# Altium PCB driver_PCB.PcbDoc
Units mil, origin at the board's own origin, x right, y up, seen from the top; angles counter-clockwise.
Board outline 3950 x 1975 mil, 2 copper layers (Top Layer, Bottom Layer); 49 components, 34 nets, 120 pads, 20 vias.
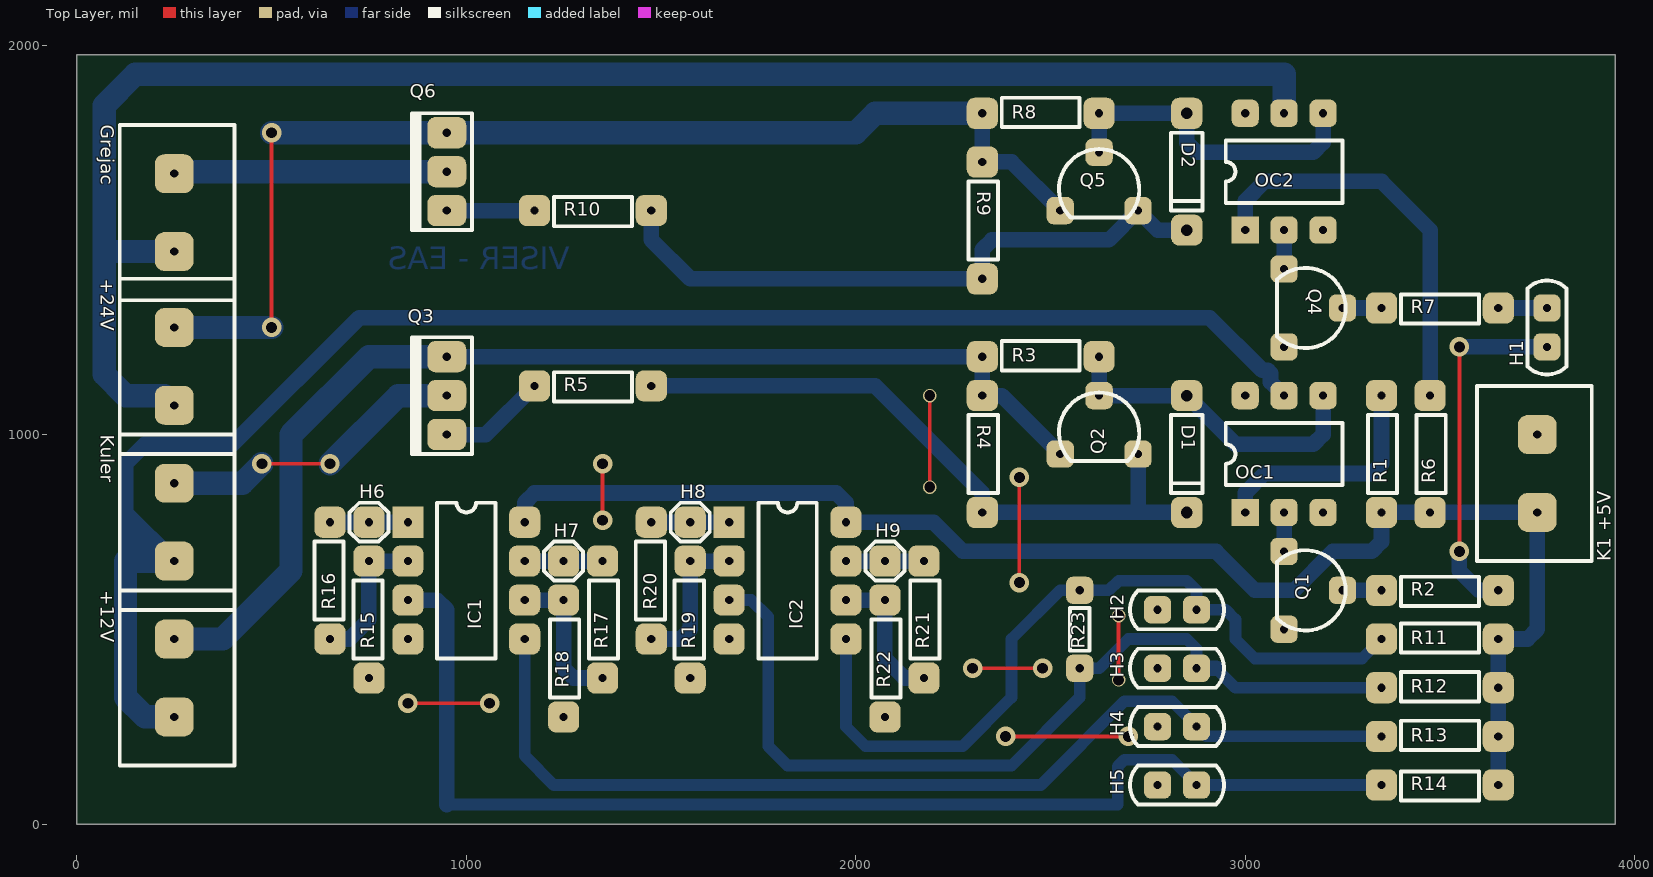
[diagram p0: Top Layer view]
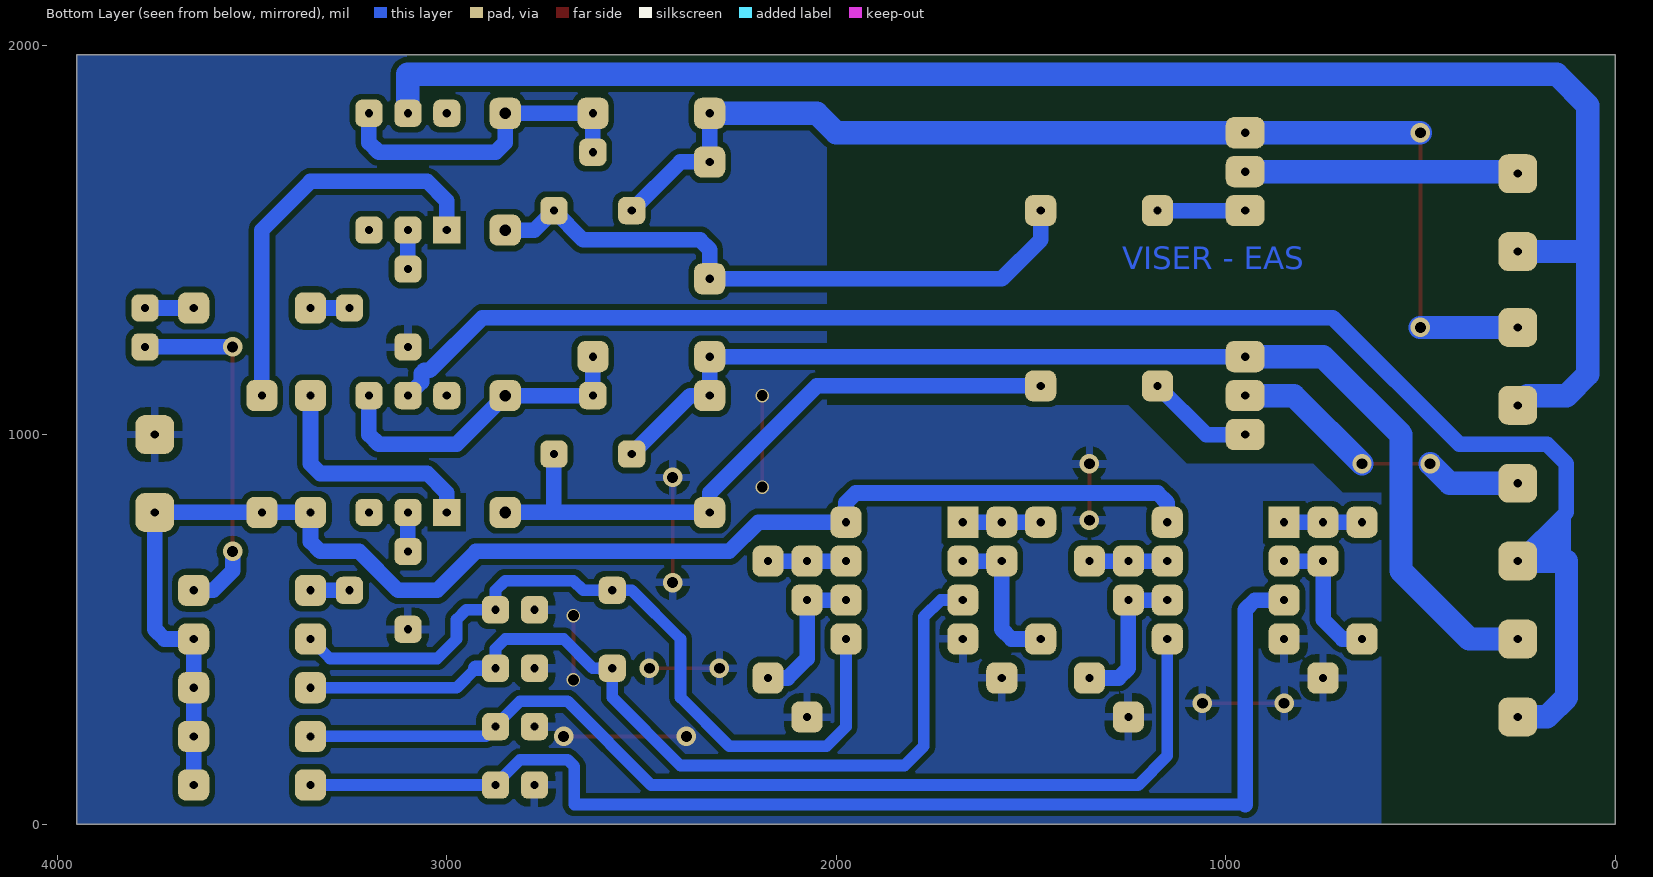
[diagram p1: Bottom Layer view, seen from below]
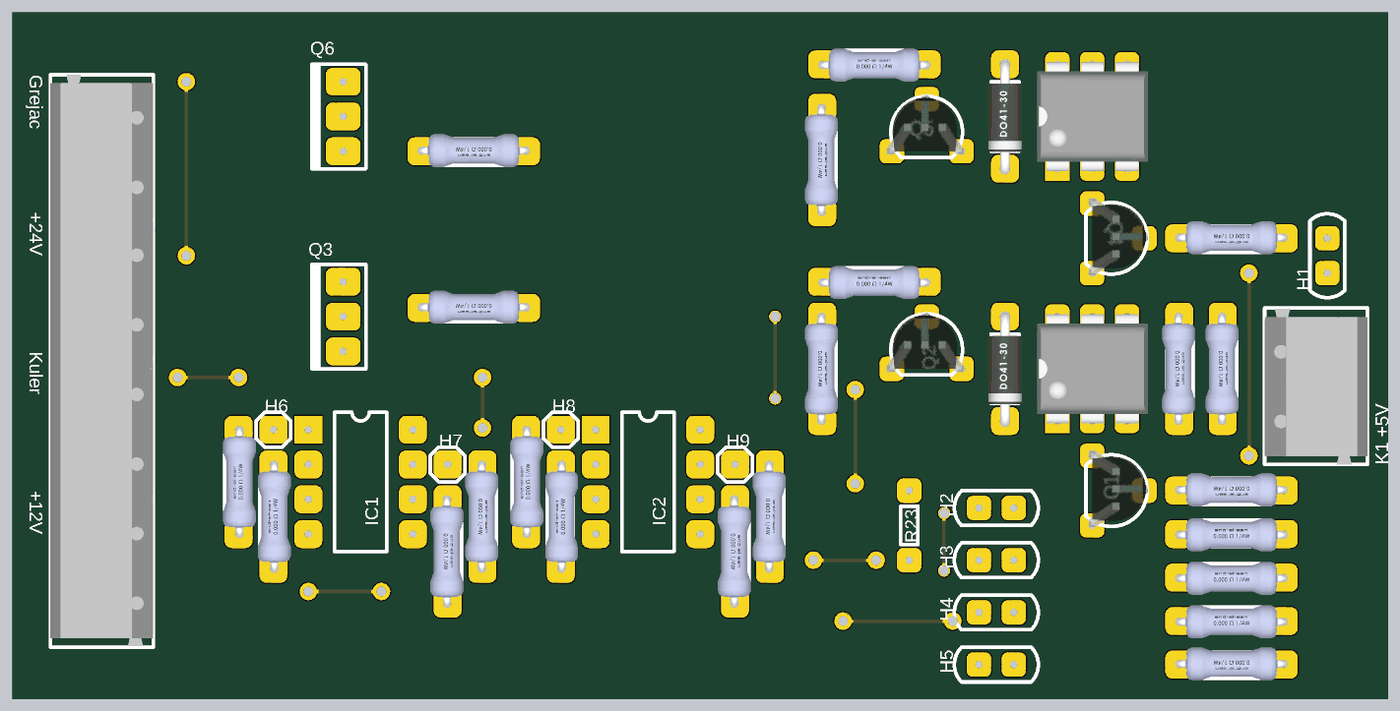
[diagram p2: 3D render of the assembled board from above, using the file's embedded part models]

## Layer stack, top to bottom
Top Solder: solder mask 0.4, Solder Resist, Dk 3.5
Top Layer: signal copper 1.4
Dielectric 1: dielectric 12.6, FR-4, Dk 4.8
Bottom Layer: signal copper 1.4
Bottom Solder: solder mask 0.4, Solder Resist, Dk 3.5

## Board outline
0,0 3950,0 3950,1975 0,1975

## Design rules (kind name [scope] priority, off if disabled: settings)
Clearance [All] p1: gap=15
PlaneClearance [All] p1: clearance=10
PlaneConnect [All] p1: planeconnectstyle=Relief reliefexpansion=20 reliefentries=4 reliefconductorwidth=20 reliefairgap=10
PolygonConnect [All] p1: connectstyle=Relief reliefconductorwidth=20 reliefentries=4 polygonreliefangle="90 Angle" airgapwidth=20
RoutingVias [All] p1: holewidth=28 width=50 viastyle="Through Hole" minholewidth=28 minwidth=50 maxholewidth=28 maxwidth=50
SolderMaskExpansion [All] p1: expansion=4
Width [All] p1: maxlimit=60 minlimit=10 preferedwidth=40 toplayer_maxwidth=10 toplayer_prefwidth=10 bottomlayer_minwidth=20 minimp=50.000000 maximp=50.000000 favimp=50.000000
28 further rules are at their usual default settings.

## Components (designator, comment, footprint, x,y, rotation, side; value= is the part's Value field where it differs from the comment)
+12V "Klema" Klema 250,275 r90 top (schematic designator K3)
+24V "Klema" Klema 250,1075 r90 top (schematic designator K5)
D1 "1n4148" D1(300milsa) 2850,1100 r270 top
D2 "1n4148" D1(300milsa) 2850,1825 r270 top
Grejac "Klema" Klema 250,1470 r90 top (schematic designator K4)
H1 "Header1x2" Header1x2 3775,1225 r90 top
H2 "PT100" Header1x2 2775,550 r0 top
H3 "PTKK" Header1x2 2775,400 r0 top
H4 "PT100" Header1x2 2775,250 r0 top
H5 "NTC" Header1x2 2775,100 r0 top
H6 "I1" H1x1 750,775 r0 top
H7 "I2" H1x1 1250,675 r0 top
H8 "I3" H1x1 1575,775 r0 top
H9 "I4" H1x1 2075,675 r0 top
IC1 "OP_AMP 358" DIP8 850,775 r0 top
IC2 "OP_AMP 358" DIP8 1675,775 r0 top
"K1 +5V" "Klema" Klema 3750,1000 r270 top (schematic designator K1)
Kuler "Klema" Klema 250,675 r90 top (schematic designator K2)
OC1 "4n35" DIP6 3000,800 r90 top
OC2 "4n35" DIP6 3000,1525 r90 top
Q1 "BC547" TO-92 3100,700 r270 top
Q2 "BC357" TO-92 2525,950 r0 top
Q3 "IRF540N" "N-Channel MOSFET" 950,1000 r90 top
Q4 "BC547" TO-92 3100,1425 r270 top
Q5 "BC357" TO-92 2525,1575 r0 top
Q6 "IRF540N" "N-Channel MOSFET" 950,1575 r90 top
R1 "1K" R1(300milsa) 3350,1100 r270 top
R2 "10k" R1(300milsa) 3650,600 r180 top
R3 "1K" R1(300milsa) 2325,1200 r0 top
R4 "1K" R1(300milsa) 2325,1100 r270 top
R5 "22" R1(300milsa) 1475,1125 r180 top
R6 "1K" R1(300milsa) 3475,1100 r270 top
R7 "10k" R1(300milsa) 3650,1325 r180 top
R8 "1K" R1(300milsa) 2325,1825 r0 top
R9 "1K" R1(300milsa) 2325,1700 r270 top
R10 "22" R1(300milsa) 1475,1575 r180 top
R11 "4k7" R1(300milsa) 3350,475 r0 top
R12 "4k7" R1(300milsa) 3350,350 r0 top
R13 "4k7" R1(300milsa) 3350,225 r0 top
R14 "4k7" R1(300milsa) 3650,100 r180 top
R15 "1K2" R1(300milsa) 750,375 r90 top
R16 "4k22" R1(300milsa) 650,475 r90 top
R17 "33K" R1(300milsa) 1350,675 r270 top
R18 "1K2" R1(300milsa) 1250,575 r270 top
R19 "1K2" R1(300milsa) 1575,375 r90 top
R20 "240K" R1(300milsa) 1475,475 r90 top
R21 "33K" R1(300milsa) 2175,675 r270 top
R22 "1K2" R1(300milsa) 2075,575 r270 top
R23 "0R" R1(200milsa) 2575,600 r270 top

## Footprints (in the part's own frame and the unit in brackets; to place one, negate y for a bottom-side part, rotate by r counter-clockwise, add the part's x,y. Pads: shape width x height; smd on the part's side, far side on the other; paste and mask are expansions set on the pad)
D1(300milsa) [mil]
  rrect50% 80x80 hole 30: 1(0,0) 2(300,0)
  silkscreen extent 50,-40 250,40, body extent -10,-47 318,47, height 100
DIP6 [mil]
  rect 70x70 hole 21: 1(0,0)
  rrect50% 70x70 hole 21: 2(0,-100) 3(0,-200) 4(300,-200) 5(300,-100) 6(300,0)
  silkscreen extent 70,-250 230,50, body extent -7,-260 307,58, height 180
DIP8 [mil]
  rect 80x80 hole 21: 1(0,0)
  rrect50% 80x80 hole 21: 2(0,-100) 3(0,-200) 4(0,-300) 5(300,-300) 6(300,-200) 7(300,-100) 8(300,0)
  silkscreen extent 75,-350 225,50
H1x1 [mil]
  rrect50% 80x80 hole 21: 1(0,0)
  silkscreen extent -50,-50 50,50
Header1x2 [mil]
  rrect50% 70x70 hole 21: 1(0,0) 2(100,0)
  silkscreen extent -71,-50 171,50
Klema [mil]
  rrect50% 100x100 hole 21: 1(0,0) 2(200,0)
  silkscreen extent -125,-155 325,140, body extent -122,-155 325,140, height 392
"N-Channel MOSFET" [mil]
  rrect50% 80x100 hole 21: 1(0,0) 2(100,0) 3(200,0)
  silkscreen extent -50,-65 250,90
R1(200milsa) [mil]
  rrect50% 70x70 hole 21: 1(0,0) 2(200,0)
  silkscreen extent 45,-25 155,25
R1(300milsa) [mil]
  rrect50% 80x80 hole 21: 1(0,0) 2(300,0)
  silkscreen extent 50,-35 250,40, body extent -12,-49 312,45, height 95
TO-92 [mil]
  rrect50% 70x70 hole 21: 1(100,150) 2(200,0) 3(0,0)
  silkscreen extent -3,-18 203,158, body extent -15,-9 205,159, height 385

## Part data
D1 D2: library part D1
H2 H3 H4 H5: library part Header1x2
H6 H7 H8 H9: library part H1x1
OC1 OC2: library part 4n35(optocapler)
Q1 Q4: library part "Transistor NPN"
Q2 Q5: library part "Transistor PNP"
Q3 Q6: library part "N-Channel MOSFET"
R1 R2 R3 R4 R5 R6 R7 R8 R9 R10 R11 R12 R13 R14 R15 R16 R17 R18 R19 R20 R21 R22 R23: library part R1

## Via types
v1: diameter 50, hole 28, Top Layer to Bottom Layer, 16 vias
v2: diameter 35, hole 28, Top Layer to Bottom Layer, 4 vias

## Nets (pads, with @x,y where several pads share a name; then routed paths per layer and width w, separated by ;. In a path a pad name is that pad's centre, name@x,y a point inside that pad or via, vN(x,y) a via of type N, cw(c..) or ccw(c..) an arc to the next point about the centre after c; other vN are vias at no path point)
+5: "K1 +5V.2" IC1.8 IC2.8 R1.2 R6.2 R11.2 R12.2 R13.2 R14.1 | length 3705.3
  Bottom Layer w40: IC1.8 1150,825 1175,850 1950,850 1975,825 IC2.8 2200,775 2275,700 2925,700 3025,600 3125,600 3225,700 3325,700 3350,725 R1.2 R6.2 3750,800 3750,500 3725,475 R11.2 R12.2 R13.2 R14.1
+12: +12V.1 Kuler.1 OC1.5 | length 4151.5
  Bottom Layer w40: 125,681 131,675 ; Kuler.1 125,800 125,925 175,975 400,975 725,1300 2908.68,1300 3043.68,1165 3057.82,1165 3065,1157.82 3065,1135 OC1.5
  Bottom Layer w60: 125,675 125,325 175,275 +12V.1 ; 131,675 Kuler.1
+24: +24V.1 Grejac.1 OC2.5 | length 4246.3
  Bottom Layer w60: +24V.1 225,1100 125,1100 70,1155 70,1470 ; Grejac.1 70,1470 ; OC2.5 3100,1925 150,1925 70,1845 70,1470
GND: "K1 +5V.1" H2.1 H3.1 H4.1 H5.1 IC1.4 IC2.4 Q1.2 Q4.2 R15.1 R18.2 R19.1 R22.2 | length 1520
  Top Layer w10: v1(850,310) v1(1060,310) ; v1(1350,780) v1(1350,925) ; v2(2190,865) v2(2190,1100) ; v1(2300,400) v1(2480,400) ; v1(2385,225) v1(2700,225) ; v1(2420,620) v1(2420,890) ; v2(2675,370) v2(2675,535)
GND1: +12V.2 Q2.3 Q3.3 R3.1 R4.1 | length 2942.5
  Bottom Layer w40: Q3.3 R3.1 R4.1 2375,1100 Q2.3
  Bottom Layer w60: +12V.2 375,475 550,650 550,1000 750,1200 Q3.3
GND2: +24V.2 Q5.3 Q6.3 R8.1 R9.1 | length 2972.5
  Top Layer w10: v1(500,1275) v1(500,1775)
  Bottom Layer w40: R8.1 R9.1 2400,1700 Q5.3
  Bottom Layer w60: +24V.2 v1(500,1275) ; v1(500,1775) Q6.3 2000,1775 2050,1825 R8.1
NetD1_1: D1.1 OC1.4 Q2.1 R3.2 | length 837.1
  Bottom Layer w40: R3.2 Q2.1 D1.1 2975,975 3175,975 3200,1000 OC1.4
NetD1_2: D1.2 Q2.2 R4.2 R5.1 | length 1688.9
  Bottom Layer w40: R5.1 2050,1125 2325,850 R4.2 2725,800 ; Q2.2 2725,800 ; D1.2 2725,800
NetD2_1: D2.1 OC2.4 Q5.1 R8.2 | length 845.7
  Bottom Layer w40: Q5.1 R8.2 D2.1 2850,1750 2875,1725 3175,1725 3200,1750 OC2.4
NetD2_2: D2.2 Q5.2 R9.2 R10.1 | length 1628.6
  Bottom Layer w40: R10.1 1475,1500 1575,1400 R9.2 2325,1475 2350,1500 2650,1500 Q5.2 2775,1525 D2.2
NetH1_1: H1.1 R2.1 | length 920.7
  Top Layer w10: v1(3550,700) v1(3550,1225)
  Bottom Layer w40: v1(3550,700) 3550,650 3600,600 R2.1 ; v1(3550,1225) H1.1
NetH1_2: H1.2 R7.1 | length 125
  Bottom Layer w40: R7.1 H1.2
NetH2_2: H2.2 IC2.5 R11.1 R23.1 | length 2046.8
  Bottom Layer w30: IC2.5 1975,250 2025,200 2275,200 2400,325 2400,475 2525,600 R23.1 2650,600 2675,625 2850,625 2875,600 H2.2 2950,550 2975,525 2975,475 3025,425 3300,425 R11.1
NetH3_2: H3.2 IC2.3 R12.1 R23.2 | length 2305.1
  Bottom Layer w30: IC2.3 1732,575 1775,532 1775,200 1825,150 2400,150 2575,325 R23.2 2625,400 2700,475 2850,475 2875,450 H3.2 ; 2925,400 2975,350 R12.1
  Bottom Layer w40: H3.2 2925,400
NetH4_2: H4.2 IC1.5 R13.1 | length 2658.7
  Bottom Layer w30: IC1.5 1150,175 1225,100 2475,100 2690,315 2812.18,315 H4.2@2875,252.18 ; H4.2 2900,225 R13.1
  Bottom Layer w40: H4.2 H4.2@2875,252.18
NetH5_2: H5.2 IC1.3 R14.2 | length 3143.5
  Bottom Layer w30: 950,50 2672.82,50 2672.82,147.82 2690,165 2812.18,165 H5.2@2875,102.18 ; H5.2 R14.2
  Bottom Layer w40: IC1.3 925,575 950,550 950,50 ; H5.2 H5.2@2875,102.18
NetH6_1: H6.1 IC1.1 R16.2 | length 200
  Bottom Layer w40: R16.2 H6.1 IC1.1
NetH7_1: H7.1 IC1.7 R17.1 | length 200
  Bottom Layer w40: IC1.7 H7.1 R17.1
NetH8_1: H8.1 IC2.1 R20.2 | length 200
  Bottom Layer w40: R20.2 H8.1 IC2.1
NetH9_1: H9.1 IC2.7 R21.1 | length 200
  Bottom Layer w40: IC2.7 H9.1 R21.1
NetIC1_2: IC1.2 R15.2 R16.1 | length 370.7
  Bottom Layer w40: R16.1 700,475 750,525 R15.2 IC1.2
NetIC1_6: IC1.6 R17.2 R18.1 | length 385.4
  Bottom Layer w40: IC1.6 R18.1 1250,400 1275,375 R17.2
NetIC2_2: IC2.2 R19.2 R20.1 | length 385.4
  Bottom Layer w40: R20.1 1550,475 1575,500 R19.2 IC2.2
NetIC2_6: IC2.6 R21.2 R22.1 | length 370.7
  Bottom Layer w40: IC2.6 R22.1 2075,425 2125,375 R21.2
NetK2_2: Kuler.2 Q3.2 | length 793.2
  Top Layer w10: v1(475,925) v1(650,925)
  Bottom Layer w60: Kuler.2 425,875 v1(475,925) ; v1(650,925) 825,1100 Q3.2
NetK4_2: Grejac.2 Q6.2 | length 700
  Bottom Layer w60: Grejac.2@250,1675 Q6.2
NetOC1_1: OC1.1 R1.1 | length 606.1
  Bottom Layer w40: OC1.1 3000,850 3050,900 3325,900 3350,925 R1.1
NetOC1_2: OC1.2 Q1.3 | length 100
  Bottom Layer w40: Q1.3 OC1.2
NetOC2_1: OC2.1 R6.1 | length 1047.5
  Bottom Layer w40: OC2.1 3000,1600 3050,1650 3350,1650 3475,1525 R6.1
NetOC2_2: OC2.2 Q4.3 | length 100
  Bottom Layer w40: Q4.3 OC2.2
NetQ1_1: Q1.1 R2.2 | length 100
  Bottom Layer w40: Q1.1 R2.2
NetQ3_1: Q3.1 R5.2 | length 276.8
  Bottom Layer w40: Q3.1 1050,1000 R5.2
NetQ4_1: Q4.1 R7.2 | length 100
  Bottom Layer w40: Q4.1 R7.2
NetQ6_1: Q6.1 R10.2 | length 225
  Bottom Layer w40: Q6.1 R10.2
pads on no net: OC1.3 OC1.6 OC2.3 OC2.6

## Polygon pours and split planes (outlines as drawn)
GND on Bottom Layer "GND" (solid, pour order 10): 3950,1975 3950,0 600,0 600,850 700,850 775,925 1075,925 1100,925 1225,1050 1250,1075 2025,1075 2025,1975

## Other copper
Bottom Layer:
  rectangle net +12: 125,681 194,753
  rectangle net +12: 113,698 147,796
  text "VISER - EAS" at 1265,1405 h100

## Silkscreen, mask and mechanical layers (free items; w line width, h text height)
Mechanical 1:
  the board outline again, w10